# Altium PCB REL_IRF_MEZ_v2.PcbDoc
Units mm, origin at the board's own origin, x right, y up, seen from the top; angles counter-clockwise.
Board outline 27.97 x 22.89 mm, 2 copper layers (Top Layer, Bottom Layer); 9 components, 20 nets, 46 pads, 0 vias.
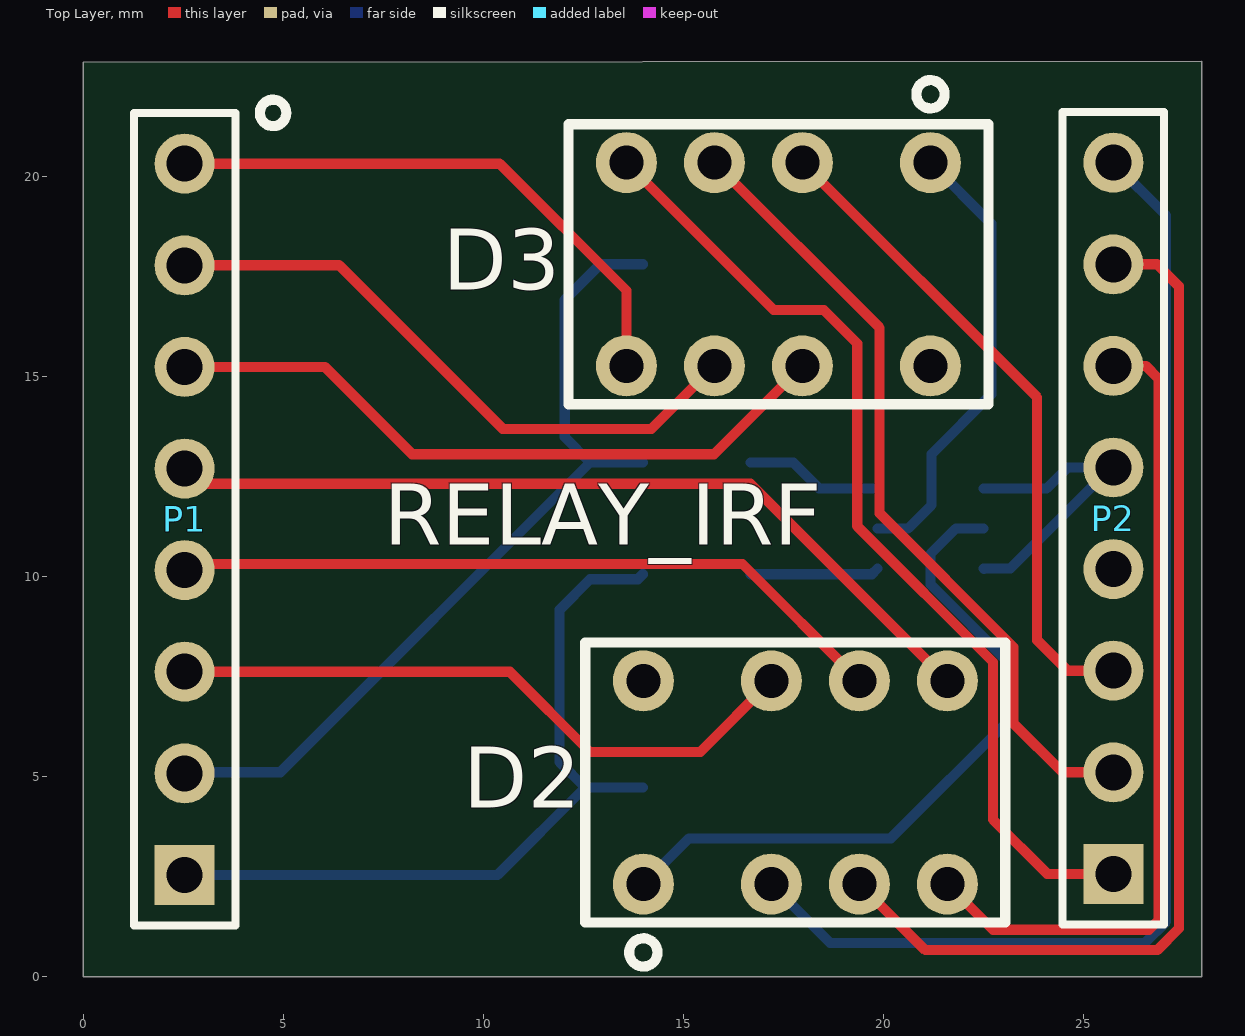
[diagram p0: Top Layer view]
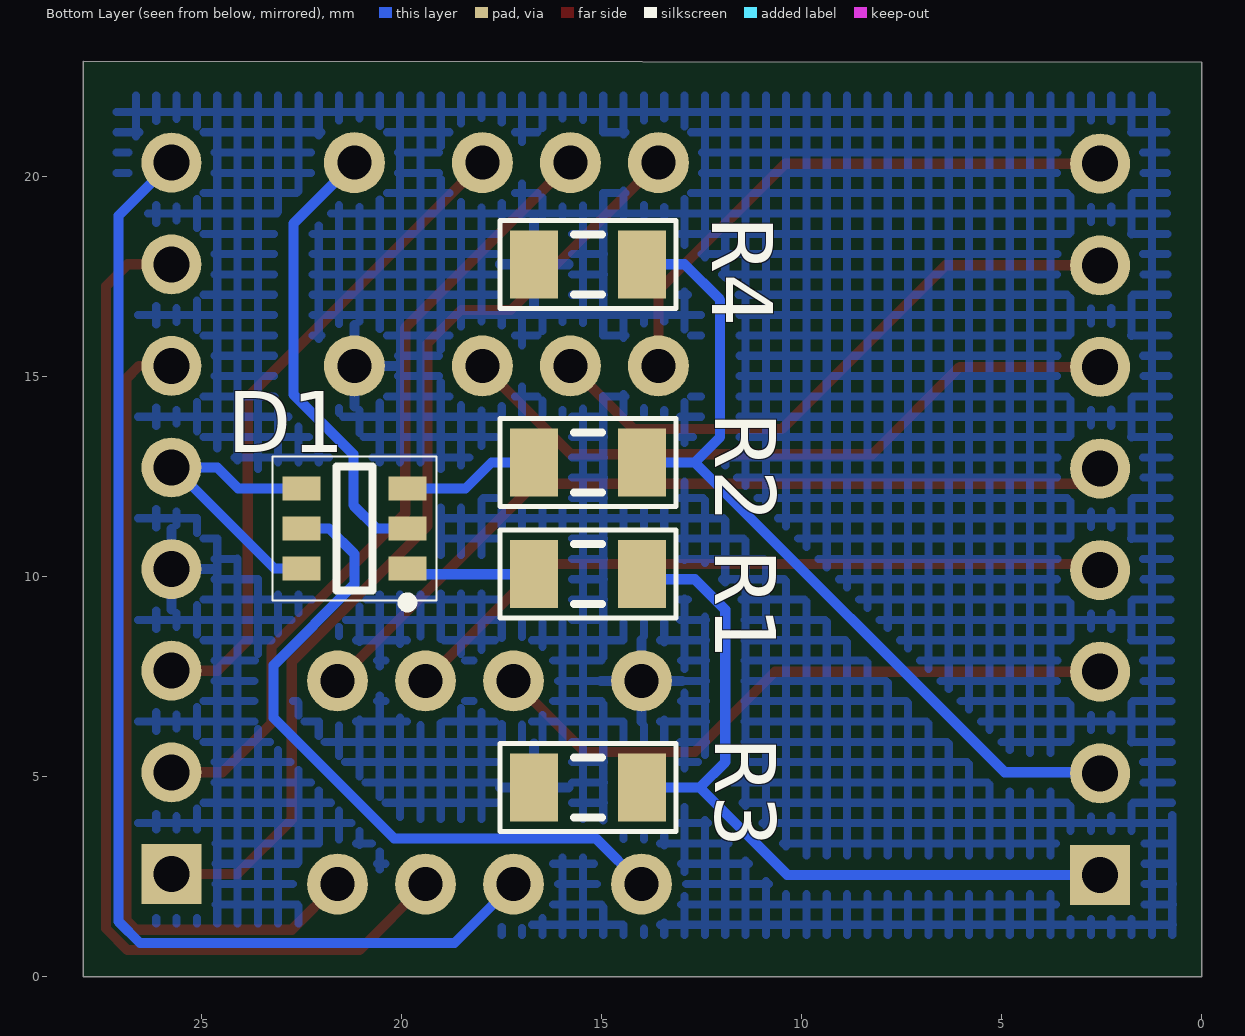
[diagram p1: Bottom Layer view, seen from below]
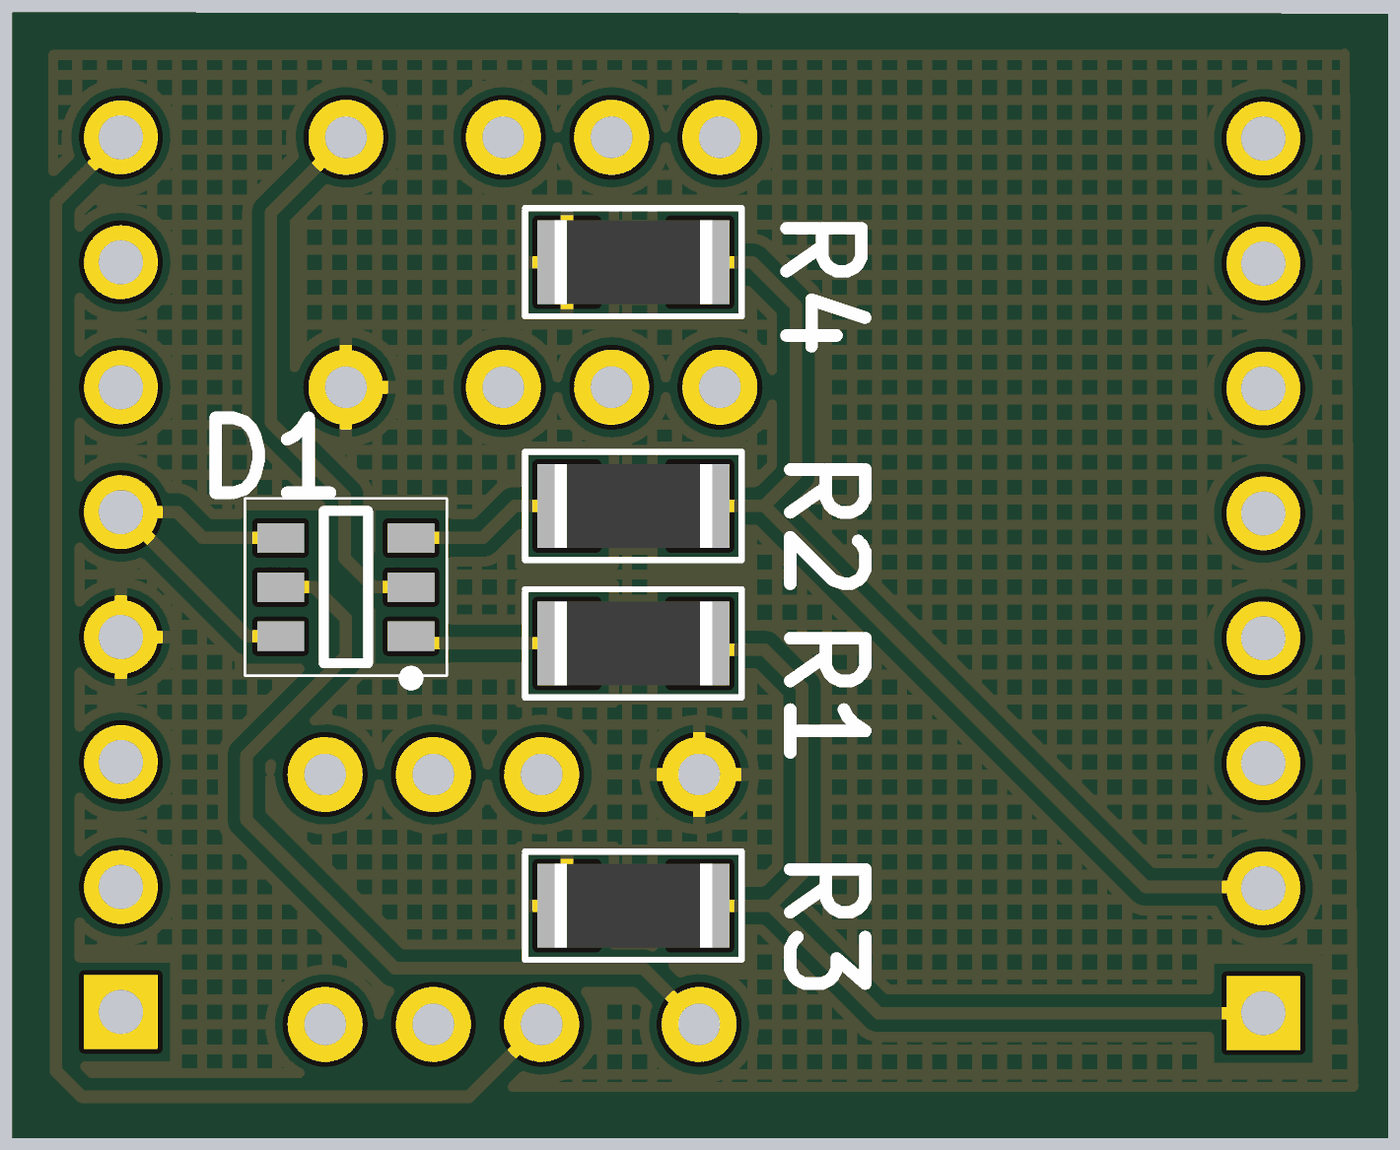
[diagram p2: 3D render of the assembled board from below, using the file's embedded part models]

## Layer stack, top to bottom
Top Solder: solder mask 0.0102, Solder Resist, Dk 3.5
Top Layer: signal copper 0.0356
Dielectric 1: dielectric 0.32, FR-4, Dk 4.8
Bottom Layer: signal copper 0.0356
Bottom Solder: solder mask 0.0102, Solder Resist, Dk 3.5

## Board outline
0,22.86 0,0 27.965,0 27.965,22.885

## Design rules (kind name [scope] priority, off if disabled: settings)
Clearance [All] p1: gap=0.254 ignorepadtopadclearanceinfootprint=FALSE except(0: Arc-Hole Track-Hole SMDPad-Hole THPad-Hole Via-Hole Fill-Hole Poly-Hole Region-Hole Text-Hole)
PolygonConnect [All] p1: connectstyle=Relief reliefconductorwidth=0.254 reliefentries=4 polygonreliefangle="90 Angle" airgapwidth=0.254
RoutingVias [All] p1: holewidth=0.711 width=1.27 viastyle="Through Hole" minholewidth=0.711 minwidth=1.27 maxholewidth=0.711 maxwidth=1.27
SolderMaskExpansion [All] p1: expansion=0.102
Width [All] p1: maxlimit=0.254 minlimit=0.254 preferedwidth=0.254
30 further rules are at their usual default settings.

## Components (designator, comment, footprint, x,y, rotation, side; value= is the part's Value field where it differs from the comment)
D1 "IRF5852PbF" IRF5852PbF 21.184,11.201 r0 bottom
D2 "HFD4 (IM03TS)" "HFD4 (IM03TS)" 17.806,4.851 r0 top
D3 "HFD4 (IM03TS)" "HFD4 (IM03TS)" 17.384,17.805 r180 top
P1 "Header 8" HDR1X8 2.54,2.54 r90 top
P2 "Header 8" HDR1X8 25.756,2.565 r90 top
R1 "240" RES_1206 15.342,10.058 r0 bottom
R2 "240" RES_1206 15.342,12.852 r0 bottom
R3 "1М" RES_1206 15.342,4.724 r0 bottom
R4 "1М" RES_1206 15.342,17.805 r180 bottom

## Footprints (in the part's own frame and the unit in brackets; to place one, negate y for a bottom-side part, rotate by r counter-clockwise, add the part's x,y. Pads: shape width x height; smd on the part's side, far side on the other; paste and mask are expansions set on the pad)
HDR1X8 [mm] "Connector; Header; 8 Position"
  rect 1.5x1.5 hole 0.9: 1(0,0)
  round 1.5 hole 0.9: 2(2.54,0) 3(5.08,0) 4(7.62,0) 5(10.16,0) 6(12.7,0) 7(15.24,0) 8(17.78,0)
  silkscreen extent -1.27,-1.27 19.05,1.27
"HFD4 (IM03TS)" [mm]
  round 1.524 hole 0.85: 1(-3.8,-2.54) 2(-0.6,-2.54) 3(1.6,-2.54) 4(3.8,-2.54) 5(3.8,2.54) 6(1.6,2.54) 7(-0.6,2.54) 8(-3.8,2.54)
  silkscreen extent -5.25,-4.6 5.25,3.5
IRF5852PbF [mm] "TSOP, 6-Leads, Body 3,00x1,50mm, Pitch 1,00mm, IPC Medium Density"
  rect 0.95x0.6 smd: 1(-1.325,1) 2(-1.325,0) 3(-1.325,-1) 4(1.325,-1) 5(1.325,0) 6(1.325,1)
  silkscreen extent -2.05,-1.8 2.05,1.97, body extent -0.85,-1.55 0.85,1.55, height 1.1
RES_1206 [mm]
  rect 1.2x1.7 smd: 1(-1.35,0) 2(1.35,0)
  silkscreen extent -2.2,-1.1 2.2,1.1, body extent -1.6,-0.85 1.6,0.85, height 0.6

## Part data
P1 P2: "Header, 8-Pin", LatestRevisionDate=17-Jul-2002, LatestRevisionNote="Re-released for DXP Platform.", Publisher="Altium Limited"
R1 R2 R3 R4: library part RES

## Nets (pads, with @x,y where several pads share a name; then routed paths per layer and width w, separated by ;. In a path a pad name is that pad's centre, name@x,y a point inside that pad or via, vN(x,y) a via of type N, cw(c..) or ccw(c..) an arc to the next point about the centre after c; other vN are vias at no path point)
+6: D1.4 D1.6 P2.5 | length 7.7
  Bottom Layer w0.254: D1.4 24.089,12.201 24.613,12.725 25.705,12.725 23.181,10.201 D1.6 D1.6@22.525,10.185
+6_R1: D1.5 D2.1 | length 17.4
  Bottom Layer w0.254: D2.1 15.149,3.454 20.193,3.454 23.203,6.464 23.203,7.785 21.184,9.804 21.184,10.566 21.819,11.201 D1.5
+6_R2: D1.2 D3.1 | length 11.4
  Bottom Layer w0.254: D1.2 20.625,11.201 21.209,11.786 21.209,13.056 22.708,14.554 22.708,18.821 D3.1
GND: D2.8 D3.8 P2.4 R3.2 R4.1
IN1: P1.1 R1.1 R3.1 | length 19.5
  Bottom Layer w0.254: P1.1 10.363,2.54 12.548,4.724 ; R3.1 12.548,4.724 ; R1.1 13.865,9.931 12.675,9.931 11.913,9.169 11.913,5.359 12.548,4.724
IN2: P1.2 R2.1 R4.2 | length 21.3
  Bottom Layer w0.254: P1.2 2.565,5.105 4.928,5.105 12.675,12.852 ; R2.1 12.675,12.852 ; R4.2 12.929,17.805 12.04,16.916 12.04,13.487 12.675,12.852
NetD1_1: D1.1 R1.2 | length 3.2
  Bottom Layer w0.254: R1.2 19.716,10.058 D1.1
NetD1_3: D1.3 R2.2 | length 3.4
  Bottom Layer w0.254: R2.2 17.755,12.852 18.406,12.201 D1.3
R1_2: D2.2 P2.8 | length 30.3
  Top Layer w0.254: D2.2 D2.2@17.247,2.311
  Bottom Layer w0.254: D2.2 18.679,0.838 26.543,0.838 27.076,1.372 27.076,19.025 P2.8
R1_3: D2.3 P2.7 | length 26.8
  Top Layer w0.254: D2.3 21.057,0.66 26.855,0.66 27.395,1.2 27.395,17.259 26.848,17.805 P2.7
R1_4: D2.4 P2.6 | length 20.7
  Top Layer w0.254: D2.4 22.749,1.168 26.645,1.168 26.887,1.41 26.887,14.947 26.568,15.265 P2.6
R1_5: D2.5 P1.5 | length 21.3
  Top Layer w0.254: P1.5 2.921,12.319 16.678,12.319 D2.5
R1_6: D2.6 P1.4 | length 18.1
  Top Layer w0.254: P1.4 2.692,10.312 16.485,10.312 D2.6
R1_7: D2.7 P1.3 | length 16.2
  Top Layer w0.254: P1.3 10.668,7.62 12.675,5.613 15.428,5.613 D2.7
R2_2: D3.2 P2.3 | length 16.6
  Top Layer w0.254: D3.2 23.851,14.478 23.851,8.407 24.613,7.645 P2.3
R2_3: D3.3 P2.2 | length 20.1
  Top Layer w0.254: D3.3 19.914,16.215 19.914,11.582 23.257,8.239 23.257,6.334 24.486,5.105 P2.2
R2_4: D3.4 P2.1 | length 24.5
  Top Layer w0.254: D3.4 17.267,16.662 18.517,16.662 19.355,15.824 19.355,11.259 22.749,7.865 22.749,3.921 24.105,2.565 P2.1
R2_5: D3.5 P1.8 | length 14.2
  Top Layer w0.254: P1.8 10.414,20.32 13.584,17.15 D3.5
R2_6: D3.6 P1.7 | length 15.6
  Top Layer w0.254: P1.7 6.401,17.78 10.49,13.691 14.209,13.691 D3.6
R2_7: D3.7 P1.6 | length 17.3
  Top Layer w0.254: P1.6 6.045,15.24 8.23,13.056 15.774,13.056 D3.7

## Polygon pours and split planes (outlines as drawn)
no net on Top Layer "Top Layer-No Net" (solid, pour order 4): 0.864,22.504
GND on Bottom Layer "NONET_L02_P-001" (hatched 90Degree grid 0.508 track 0.203, remove dead copper, pour order 16): 0.889,22.047 0.914,22.022 27.127,22.022 27.127,1.041 26.975,1.041 0.711,1.041

## Silkscreen, mask and mechanical layers (free items; w line width, h text height)
Top Overlay:
  circle w0.254: c4.75,21.59 r0.331
  text "RELAY_IRF" at 7.52,10.795 h1.52
Mechanical 1:
  lines w0.254: 0,0 0,22.86 0.025,22.885 27.965,22.885 27.965,0 0,0